# Altium PCB DCDC_Top_2.PcbDoc
Units mm, origin at the board's own origin, x right, y up, seen from the top; angles counter-clockwise.
Board outline 60 x 39.99 mm, 2 copper layers (Top Layer, Bottom Layer); 10 components, 16 nets, 61 pads, 4 vias.
Unrouted connection lines stored in the file: 27.
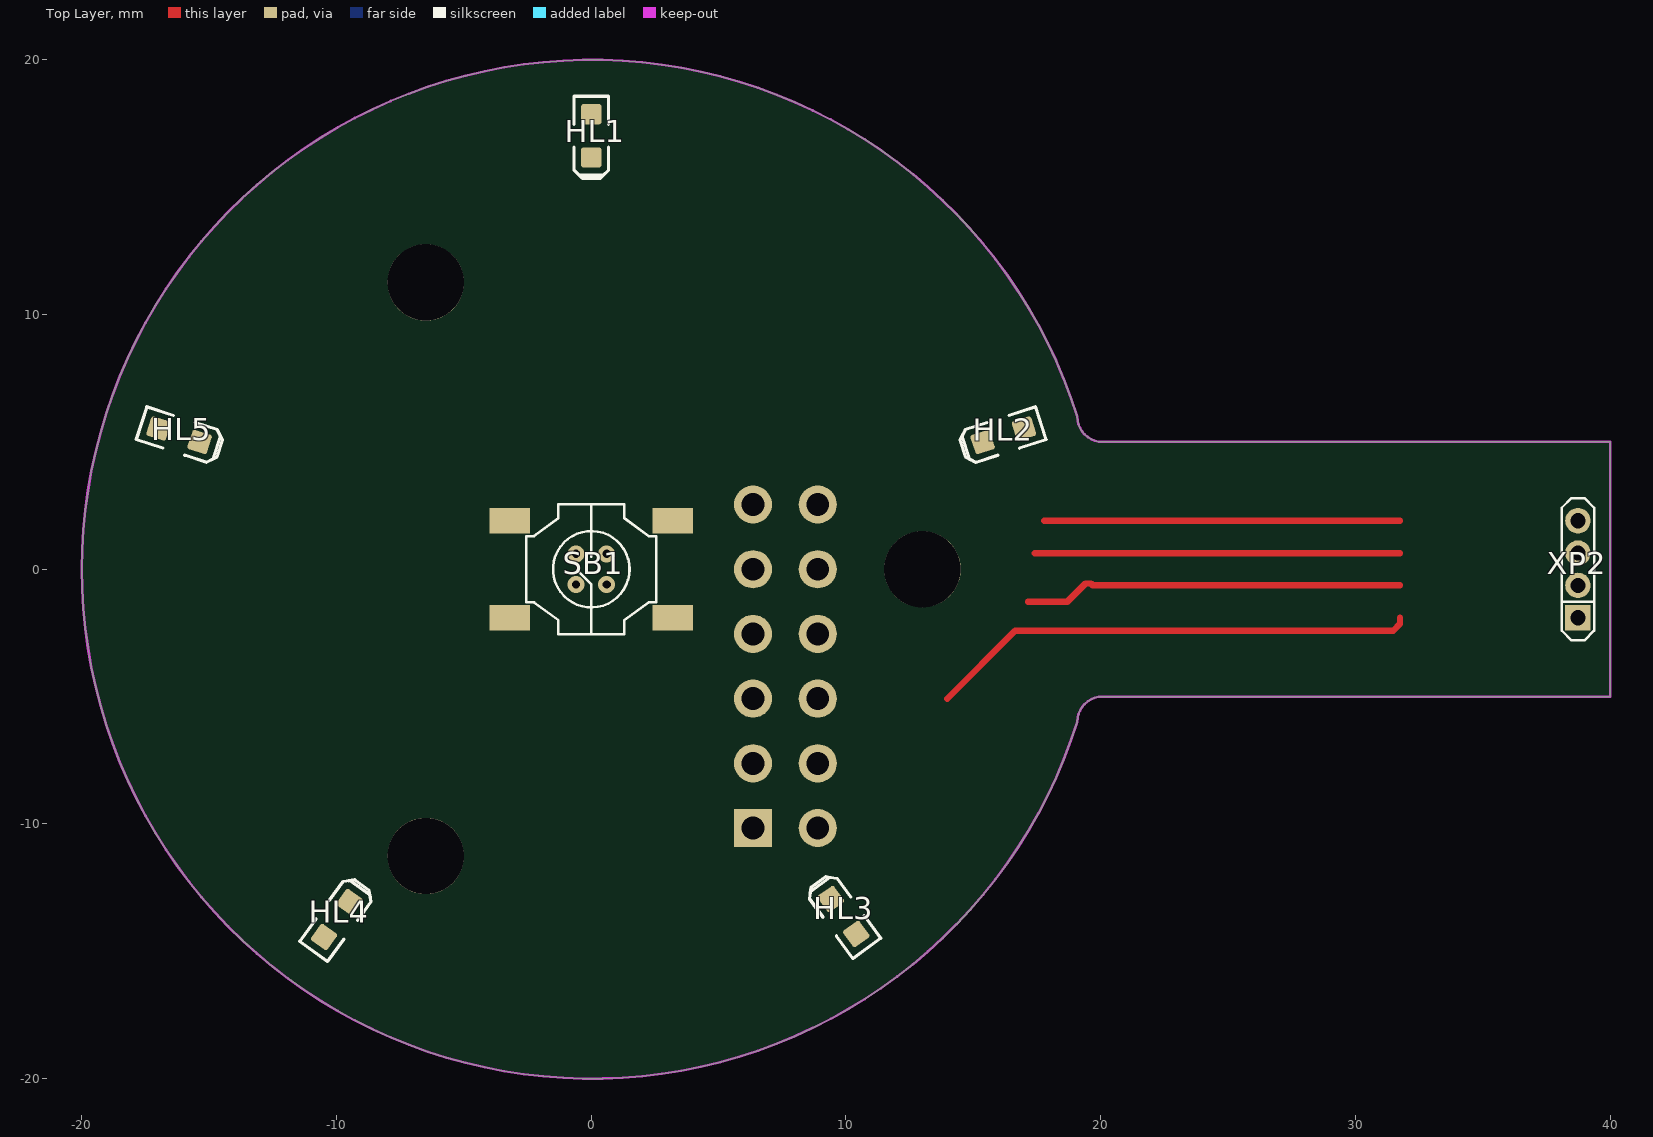
[diagram p0: Top Layer view]
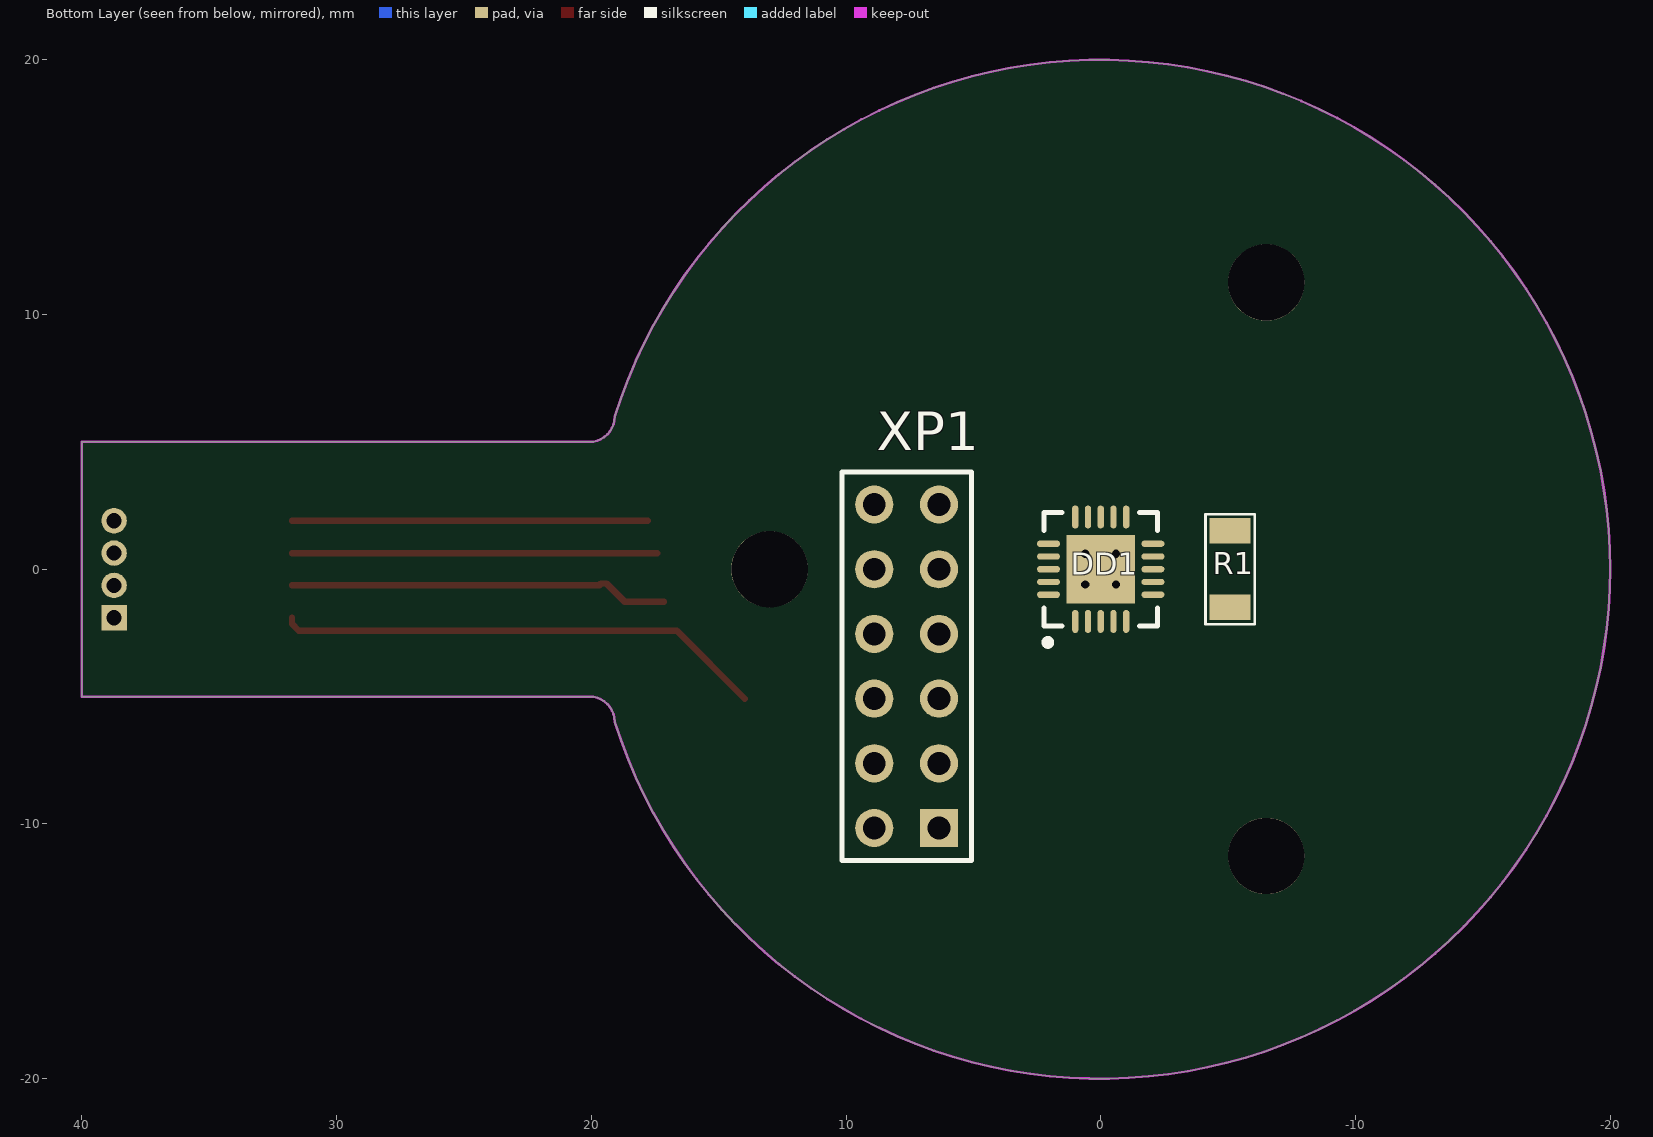
[diagram p1: Bottom Layer view, seen from below]

## Layer stack, top to bottom
Top Solder: solder mask 0.0102, Solder Resist, Dk 3.5
Top Layer: signal copper 0.0356
Dielectric 1: dielectric 0.32, FR-4, Dk 4.8
Bottom Layer: signal copper 0.0356
Bottom Solder: solder mask 0.0102, Solder Resist, Dk 3.5

## Board outline
19.079,-6 cw(c0,0) 19.079,6 ccw(c20.079,6) 20.079,5 40,5 40,-5 20.079,-5 ccw(c20.079,-6)
board region "Layer Stack Region 1": 19.685,-5.086 19.607,-5.118 19.444,-5.227 19.306,-5.366 19.197,-5.529 19.122,-5.71 19.084,-5.902 19.079,-6 18.866,-6.677 18.345,-7.997 17.733,-9.277 17.031,-10.51 16.243,-11.691 15.374,-12.812 14.427,-13.869 13.408,-14.857 12.322,-15.77 11.173,-16.603 9.968,-17.353 8.714,-18.016 7.415,-18.588 6.079,-19.067 4.713,-19.45 3.323,-19.735 1.916,-19.921 0.499,-20.006 -0.919,-19.991 -2.334,-19.876 -3.736,-19.661 -5.12,-19.346 -6.478,-18.935 -7.804,-18.428 -9.09,-17.829 -10.331,-17.14 -11.519,-16.365 -12.65,-15.507 -13.717,-14.572 -14.715,-13.563 -15.639,-12.487 -16.485,-11.347 -17.248,-10.15 -17.923,-8.902 -18.509,-7.61 -19.002,-6.279 -19.399,-4.917 -19.699,-3.53 -19.899,-2.125 -20,-0.71 -20,0.709 -19.899,2.125 -19.699,3.53 -19.399,4.917 -19.002,6.279 -18.509,7.61 -17.923,8.902 -17.248,10.15 -16.485,11.347 -15.639,12.486 -14.715,13.563 -13.717,14.572 -12.65,15.507 -11.519,16.365 -10.331,17.14 -9.09,17.829 -7.804,18.428 -6.478,18.935 -5.12,19.346 -3.736,19.661 -2.334,19.876 -0.92,19.991 0.499,20.006 1.916,19.921 3.323,19.735 4.713,19.45 6.079,19.067 7.415,18.588 8.714,18.016 9.968,17.353 11.173,16.603 12.322,15.77 13.408,14.857 14.427,13.869 15.374,12.812 16.243,11.691 17.031,10.51 17.733,9.277 18.345,7.997 18.866,6.677 19.079,6 19.084,5.902 19.122,5.71 19.197,5.529 19.306,5.366 19.444,5.227 19.607,5.118 19.685,5.086
board region "Layer Stack Region 1": 19.685,5.086 19.789,5.043 19.981,5.005 20.079,5 40,5 40,-5 20.079,-5 19.981,-5.005 19.789,-5.043 19.685,-5.086

## Design rules (kind name [scope] priority, off if disabled: settings)
Clearance [All] p1: gap=0.254 ignorepadtopadclearanceinfootprint=FALSE except(0: Arc-Hole Track-Hole SMDPad-Hole THPad-Hole Via-Hole Fill-Hole Poly-Hole Region-Hole Text-Hole)
DiffPairsRouting [All] p1: maxlimit=0.254 minlimit=0.254 mostfreqgap=0.254 substack1={B50ABEF1-B877-4C3D-B45B-AE4455B9A305} toplayer_{b50abef1-b877-4c3d-b45b-ae4455b9a305}_minwidth=0.381 toplayer_{b50abef1-b877-4c3d-b45b-ae4455b9a305}_maxwidth=0.381 toplayer_{b50abef1-b877-4c3d-b45b-ae4455b9a305}_prefwidth=0.381 bottomlayer_{b50abef1-b877-4c3d-b45b-ae4455b9a305}_minwidth=0.381 bottomlayer_{b50abef1-b877-4c3d-b45b-ae4455b9a305}_maxwidth=0.381 bottomlayer_{b50abef1-b877-4c3d-b45b-ae4455b9a305}_prefwidth=0.381 toplayer_minwidth=0.381 toplayer_maxwidth=0.381 toplayer_prefwidth=0.381 bottomlayer_minwidth=0.381 bottomlayer_maxwidth=0.381 bottomlayer_prefwidth=0.381 maxuncoupledlength=12.7
PolygonConnect [All] p1: connectstyle=Relief reliefconductorwidth=0.254 reliefentries=4 polygonreliefangle="90 Angle" airgapwidth=0.254
RoutingVias [All] p1: holewidth=0.711 width=1.27 viastyle="Through Hole" minholewidth=0.711 minwidth=1.27 maxholewidth=0.711 maxwidth=1.27
SolderMaskExpansion [All] p1: expansion=0.102 istentingtop=FALSE
Width [All] p1: maxlimit=0.254 minlimit=0.254 preferedwidth=0.254 substack1={B50ABEF1-B877-4C3D-B45B-AE4455B9A305}
29 further rules are at their usual default settings.

## Components (designator, comment, footprint, x,y, rotation, side; value= is the part's Value field where it differs from the comment)
DD1 "ATtiny2313-20MU" 20M1_M 0,0 r90 bottom
HL1 "GR-0603" LED-0603-GREEN 0,17.016 r270 top
HL2 "GR-0603" LED-0603-GREEN 16.176,5.256 r198 top
HL3 "GR-0603" LED-0603-GREEN 9.904,-13.632 r126 top
HL4 "GR-0603" LED-0603-GREEN -9.992,-13.753 r54 top
HL5 "GR-0603" LED-0603-GREEN -16.183,5.258 r342 top
R1 "1k 1%" 1206 -5.08,0 r90 bottom
SB1 "PTS525SM15SMTR2 LFS" "TACT_SWITCH KPT1187B" 0,0 r180 top
XP1 "PLD-12" PLD-12-3D 6.35,-10.16 r90 bottom
XP2 "PLS1.27-4" PLLS1.27-4 38.735,-1.905 r0 top

## Footprints (in the part's own frame and the unit in brackets; to place one, negate y for a bottom-side part, rotate by r counter-clockwise, add the part's x,y. Pads: shape width x height; smd on the part's side, far side on the other; paste and mask are expansions set on the pad)
20M1_M [mm] "QFN, 20-Leads, Body 4x4mm, Pitch 0.5mm, IPC Low Density"
  oval 0.9x0.25 smd: 1(-2.05,1) 2(-2.05,0.5) 3(-2.05,0) 4(-2.05,-0.5) 5(-2.05,-1) 11(2.05,-1) 12(2.05,-0.5) 13(2.05,0) 14(2.05,0.5) 15(2.05,1)
  oval 0.25x0.9 smd: 6(-1,-2.05) 7(-0.5,-2.05) 8(0,-2.05) 9(0.5,-2.05) 10(1,-2.05) 16(1,2.05) 17(0.5,2.05) 18(0,2.05) 19(-0.5,2.05) 20(-1,2.05)
  rect 2.7x2.7 smd: 21(0,0)
  silkscreen extent -3,-2.22 2.22,2.22, body extent -2.07,-2.07 2.07,2.07, height 0.8
1206 [mm]
  rect 1x1.6 smd: 1(-1.499,0) 2(1.501,0)
  silkscreen extent -2.16,-0.97 2.16,0.97, body extent -1.6,-0.8 1.6,0.8, height 0.6
LED-0603-GREEN [mm]
  round 0.254 on Mech15: 0(0,0)
  rrect25% 0.8x0.8 smd: A(-0.85,0) K(0.85,0)
  Top Layer pour cut-out: -0.5,0.5 0.5,0.5 0.5,-0.5 -0.5,-0.5
  silkscreen extent -1.55,-0.68 1.68,0.68, body extent -0.8,-0.4 0.8,0.4, height 0.75
PLD-12-3D [mm] "Connector; Header; 6x2 Position"
  rect 1.5x1.5 hole 0.9: 1(0,0)
  round 1.5 hole 0.9: 2(0,2.54) 3(2.54,0) 4(2.54,2.54) 5(5.08,0) 6(5.08,2.54) 7(7.62,0) 8(7.62,2.54) 9(10.16,0) 10(10.16,2.54) 11(12.7,0) 12(12.7,2.54)
  silkscreen extent -1.27,-1.27 13.97,3.81, body extent -1.27,-1.23 13.97,3.77, height 8.4
PLLS1.27-4 [mm]
  rect 1x1 hole 0.6: 1(0,0)
  round 1 hole 0.6: 2(0,1.27) 3(0,2.54) 4(0,3.81)
  silkscreen extent -0.64,-0.89 0.64,4.7
"TACT_SWITCH KPT1187B" [mm] "SMD_Button 5.2x5.2x1.6"
  rect 1.6x1 smd: 1(-3.2,1.9) 1(3.2,1.9) 2(-3.2,-1.9) 2(3.2,-1.9)
  silkscreen extent -2.55,-2.55 2.55,2.55, body extent -3.2,-2.6 3.2,2.6, height 1.5

## Part data
DD1: "Low Power tinyAVR® 8-Bit Microcontroller, 2K Flash Memory, 20MHz, Industrial Temperature, 20-Lead MLF, Pb-Free", Supplier Part Number 1=ATTINY2313-20MU-ND, Code_JEDEC=MO-220WGGD-5, ComponentLink1Description="Manufacturer Link", ComponentLink1URL=http://www.atmel.com/products/AVR/tinyavr.asp?, ComponentLink2Description=Datasheet, ComponentLink2URL=http://www.atmel.com/dyn/resources/prod_documents/doc2543.pdf, ComponentLink3Description="Atmel.com Home", ComponentLink3URL=http://www.atmel.com, DatasheetVersion="DOC2543B, Mar-2009", PackageDescription="20-pad, 4 x 4 x 0.8 mm Body, Lead Pitch 0.50 mm, 2.6 mm Exposed Pad, Micro Lead Frame Package (MLF)", PackageReference=20M1, PackageVersion="revA, Oct-2004", Part Number=ATtiny2313-20MU, Published=20-Nov-2009, Publisher="Altium Limited", Supplier 1=Digi-Key, Supplier 2=Farnell, Supplier 3=Mouser, Supplier Part Number 2=1748539, Supplier Part Number 3=556-ATTINY2313-20MU
HL1 HL2 HL3 HL4 HL5: library part 150060VS55040, "LED GREEN DIFFUSED 0603 SMD", Digi-Key Part Number=732-12017-1-ND, Mouser Part Number=710-150060VS55040, Package=0603, HelpURL=https://www.mouser.com/ProductDetail/Wurth-Elektronik/150060VS55040?qs=%2Fha2pyFaduhwKZlJ%252BauMPGbe2qb%2FJX%2FXBiS9WUTr3iltzze5OTUvag%3D%3D, Manufacturer Part Number=150060VS55040, Part Number=150060VS55040, Price$=0.115
R1: library part AA1206FR-071KL, "RES SMD 1K ohm 1% 200V AEC-Q200", Mouser Part Number=603-AA1206FR-071KL, Package=1206, HelpURL=https://eu.mouser.com/ProductDetail/Yageo/AA1206FR-071KL?qs=sGAEpiMZZMtlubZbdhIBIKyAF7UHeJ2Z5UA335zQE8A%3D, Manufacturer Part Number=AA1206FR-071KL, Part Number=AA1206FR-071KL, Price$=0.036
SB1: "SWITCH TACTILE SPST-NO 0.02A 15V", Digi-Key Part Number=CKN9104CT-ND, HelpURL=https://www.digikey.com/products/en?keywords=CKN9104CT-ND, Manufacturer Part Number="PTS525SM15SMTR2 LFS", Part Number="PTS525SM15SMTR2 LFS", Price$=0.33
XP1: Part Number=PLD-12, System=Connector
XP2: Part Number=PLS1.27-4, System=Connector

## Free pads (board coordinates)
  round 3 hole 3: 0(-6.5,11.258) 1(-6.5,-11.258) 2(13,0)

## Via types
v1: diameter 0.66, hole 0.33, Top Layer to Bottom Layer, 4 vias

## Nets (pads, with @x,y where several pads share a name; then routed paths per layer and width w, separated by ;. In a path a pad name is that pad's centre, name@x,y a point inside that pad or via, vN(x,y) a via of type N, cw(c..) or ccw(c..) an arc to the next point about the centre after c; other vN are vias at no path point)
A2: HL2.A XP1.3
A3: HL3.A XP1.4
A4: HL4.A XP1.5
A5: HL5.A XP1.6
A6: DD1.3 XP1.7
A7: DD1.2 XP1.8
A8: DD1.19 XP1.9
A9: DD1.10 XP1.10
A10: DD1.11 XP1.11
GND: HL1.K HL2.K HL3.K HL4.K HL5.K SB1.1 XP1.12
NetDD1_4: DD1.4 XP2.2 | length 14.9
  Top Layer w0.254: 17.145,-1.27 18.696,-1.27 19.405,-0.561 19.615,-0.561 19.689,-0.635 31.75,-0.635
NetDD1_6: DD1.6 XP2.3 | length 14.3
  Top Layer w0.254: 17.402,0.635 31.75,0.635
NetDD1_9: DD1.9 XP2.4 | length 14
  Top Layer w0.254: 17.78,1.905 31.75,1.905
NetDD1_20: DD1.20 XP2.1 | length 19.2
  Top Layer w0.254: 13.97,-5.08 16.637,-2.413 31.482,-2.413 31.75,-2.145 31.75,-1.905
SSS: HL1.A XP1.2
VCC: R1.1 R1.2 SB1.2 XP1.1
pads on no net: DD1.1 DD1.5 DD1.7 DD1.8 DD1.12 DD1.13 DD1.14 DD1.15 DD1.16 DD1.17 DD1.18 DD1.21 HL1.0 HL2.0 HL3.0 HL4.0 HL5.0
copper on no net:
  other v1: -0.6,-0.6 0.6,-0.6 -0.6,0.6 0.6,0.6

## Polygon pours and split planes (outlines as drawn)
no net on Layer0 "Default Coverlay 2 Top" (split plane): 20.32,5 33,5 33,-5 20.311,-5
no net on Layer0 "Default Coverlay 2 Bottom" (split plane): 20.32,5 33,5 33,-5 20.311,-5

## Keep-outs
Keep-Out Layer:
  the board outline again, w0.1

## Silkscreen, mask and mechanical layers (free items; w line width, h text height)
Dimensions:
  lines w0.15: 6.032,-10.477 6.667,-9.842 ; 6.032,-9.842 6.667,-10.477